# EAGLE board untitled (EAGLE 6.4)
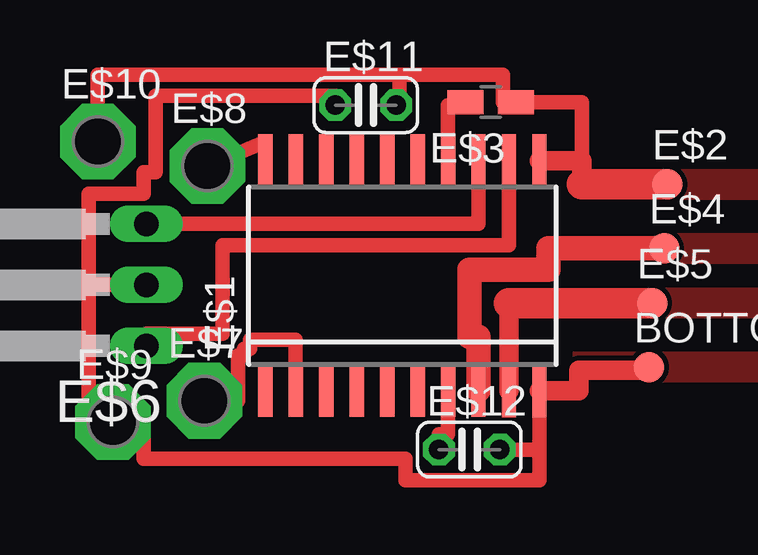
[diagram p0: board, top side]

No outline drawn. Coordinates in mm, seen from the top.
Copper layers (1*16): Top 0.035mm / dielectric 1.5mm / Bottom 0.035mm
Design rules "default": minimum track width 10mil, minimum drill 24mil, track to track 8mil, track to pad 8mil, pad to pad 8mil, via to via 8mil, smd to smd 8mil, copper to edge 40mil, drill to drill 8mil, minimum pad ring 10mil, minimum via ring 8mil, stop-mask expansion 4mil, vias tented up to drill 0mil, thermal gap 10mil

## Footprints (pad centres in the part's own frame; a part is rotated, then mirrored left to right if it is on the bottom)
B1,27 = smd 1.27 x 1.27: TP 0,0
SOIC20R = smd 0.6 x 2.2: 1 -5.715,-4.775; 2 -4.445,-4.775; 3 -3.175,-4.775; 4 -1.905,-4.775; 5 -0.635,-4.775; 6 0.635,-4.775; 7 1.905,-4.775; 8 3.175,-4.775; 9 4.445,-4.8; 10 5.715,-4.8; 11 5.715,4.8; 12 4.445,4.8; 13 3.175,4.8; 14 1.905,4.8; 15 0.635,4.8; 16 -0.635,4.8; 17 -1.905,4.8; 18 -3.175,4.8; 19 -4.445,4.8; 20 -5.715,4.8
R0805W = smd 1.5 x 1: 1 -1.052,0; 2 1.052,0
T03B = drill 1.016 long: 1 -2.54,-11.43; 2 0,-11.43; 3 2.54,-11.43
P1-20 = drill 2.007 pad 3.15 octagon: TP 0,0
C025-024X044 = drill 0.813 octagon: 1 -1.27,0; 2 1.27,0

## Placement (x,y rotation side)
BOTTOM  [B1,27]  47.12,49.53 0 top
E$1  [SOIC20R]  36.83,53.34 0 top
E$2  [B1,27]  47.88,57.15 0 top
E$3  [R0805W]  40.51,60.58 180 top
E$4  [B1,27]  47.75,54.48 0 top
E$5  [B1,27]  47.24,52.2 0 top
E$6  [T03B]  14.73,52.96 90 top
E$7  [P1-20]  28.57,48.13 0 top
E$8  [P1-20]  28.7,57.91 0 top
E$9  [P1-20]  24.77,47.24 0 top
E$10  [P1-20]  24.13,58.93 0 top
E$11  [C025-024X044]  35.31,60.45 0 top
E$12  [C025-024X044]  39.62,46.1 0 top

## Library data of the parts
BOTTOM E$2 E$4 E$5 E$7-E$10 = testpad
E$1 = analog-devices
E$3 E$11 E$12 = rcl
E$6 = linear

## Nets
S$3: E$1.8 E$4.TP
S$4: E$1.9 E$5.TP
S$7: E$1.14 E$3.2
S$8: E$1.20 E$8.TP
S$9: E$1.2 E$7.TP
S$10: E$1.13 E$6.3
S$11: E$1.1
S$12: E$1.12 E$6.1
S$13: BOTTOM.TP E$1.10 E$6.2 E$9.TP E$11.1 E$12.2
S$14: E$1.11 E$2.TP E$3.1 E$10.TP E$11.2
S$15: E$1.7 E$12.1

## Tracks (layer width: path | path; a pad name or v marks a point on that pad's centre or on a via)
BOTTOM
  pour Top: 43.94,50.16 56.64,50.16 56.64,48.9 43.94,48.9
S$1
  pour Top: 43.94,57.78 56.64,57.78 56.64,56.52 43.94,56.52
S$3
  Top 1.016: E$1.8 40.01,50.8 39.62,50.8 39.62,53.59 42.93,53.59 42.93,54.48 E$4.TP
S$4
  Top 0.813: E$1.9 41.27,52.2
  Top 1.27: 41.27,52.2 E$5.TP
S$5
  pour Top: 43.94,55.12 56.01,55.12 56.01,53.85 43.94,53.85
S$6
  pour Top: 43.94,52.83 56.01,52.83 56.01,51.56 43.94,51.56
S$7
  Top 0.61: E$1.14 38.73,60.45 39.46,60.45 E$3.2
S$8
  Top 0.61: E$1.20 31.11,58.93 E$8.TP
S$9
  Top 0.61: E$7.TP 29.97,48.13 29.97,50.04 30.23,50.04 30.23,50.29 30.48,50.29 30.48,50.67 32.38,50.67 E$1.2
S$10
  Top 0.61: E$6.3 40.01,55.5 E$1.13
S$11
  Top 0.406: 31.11,48.26 E$1.1
S$12
  Top 0.61: E$1.12 41.27,54.61 29.34,54.61 29.34,50.93 26.16,50.93 E$6.1
S$13
  Top 0.406: 42.55,48.26 E$1.10
  Top 0.61: 23.75,52.96 23.75,47.24 E$9.TP 26.04,47.24 26.04,45.72 36.96,45.72 36.96,44.83 42.55,44.83 42.55,46.1 | 42.55,46.1 E$1.10 | E$12.2 42.55,46.1 | E$6.2 23.75,52.96 | 23.75,52.96 23.75,56.77 26.04,56.77 26.04,57.66 26.54,57.66 26.54,60.83 34.04,60.83 E$11.1
  Top 0.813: E$1.10 44.2,48.54 44.2,49.4 47.12,49.4 BOTTOM.TP
S$14
  Top 0.61: 36.7,61.72 41.02,61.72 41.02,60.58 E$3.1 44.32,60.58 44.32,57.53 | 36.7,61.72 24.13,61.72 E$10.TP | E$11.2 36.7,60.45 36.7,61.72
  Top 0.813: 47.24,57.02 E$2.TP | E$1.11 44.32,58.14 44.32,57.53 44.32,57.15
  Top 1.27: 44.32,57.15 E$2.TP
S$15
  Top 0.61: E$1.7 38.73,46.74 38.35,46.74 E$12.1